# Altium PCB BoostSchDoc.PcbDoc
Units mm, origin at the board's own origin, x right, y up, seen from the top; angles counter-clockwise.
Board outline 43.43 x 26.11 mm, 2 copper layers (Top Layer, Bottom Layer); 15 components, 5 nets, 30 pads, 4 vias.
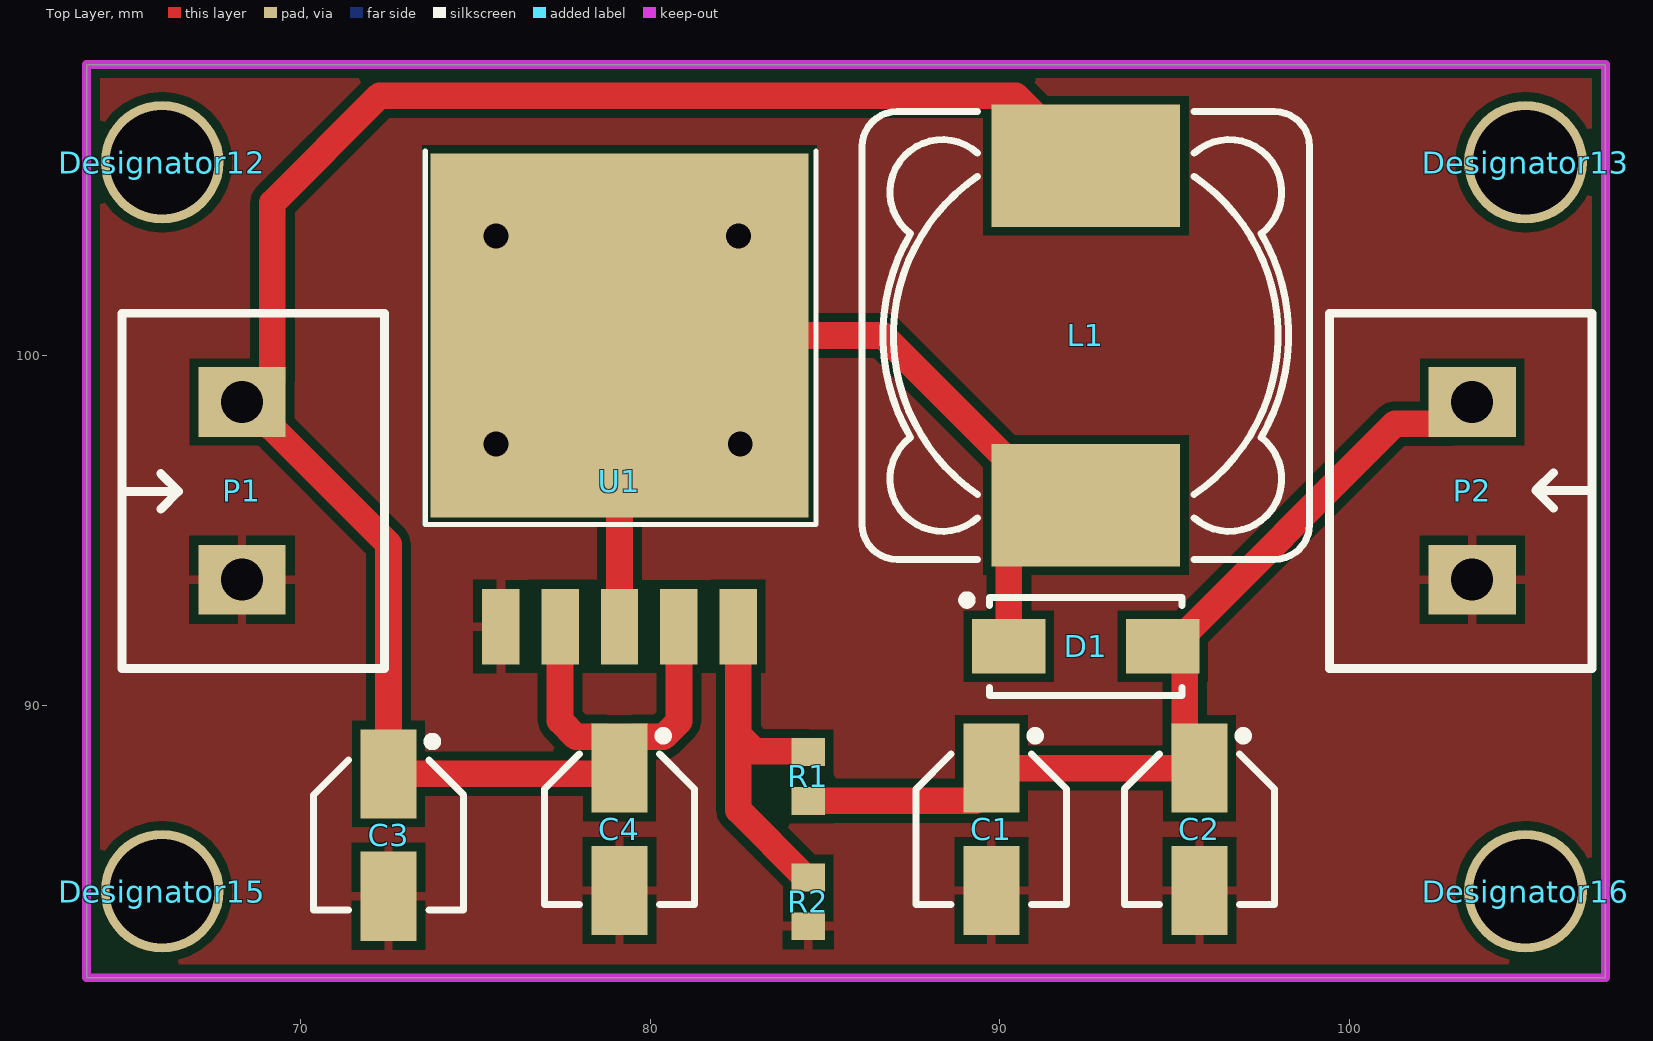
[diagram p0: Top Layer view]
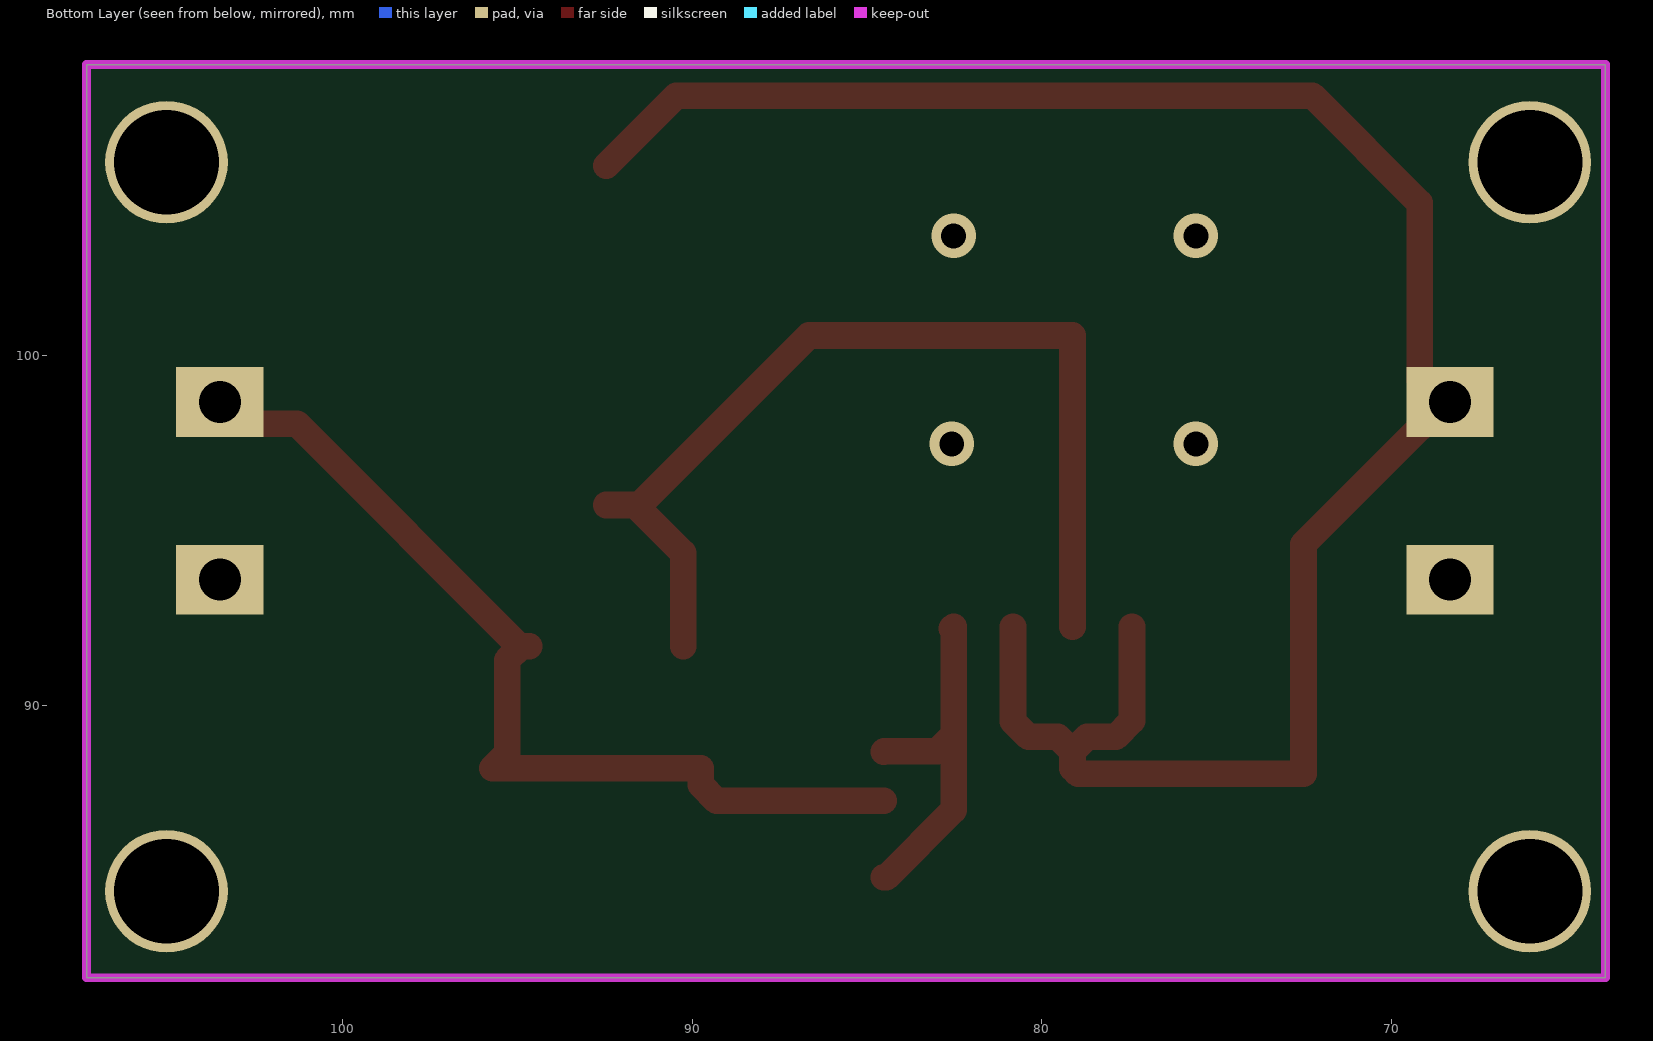
[diagram p1: Bottom Layer view, seen from below]
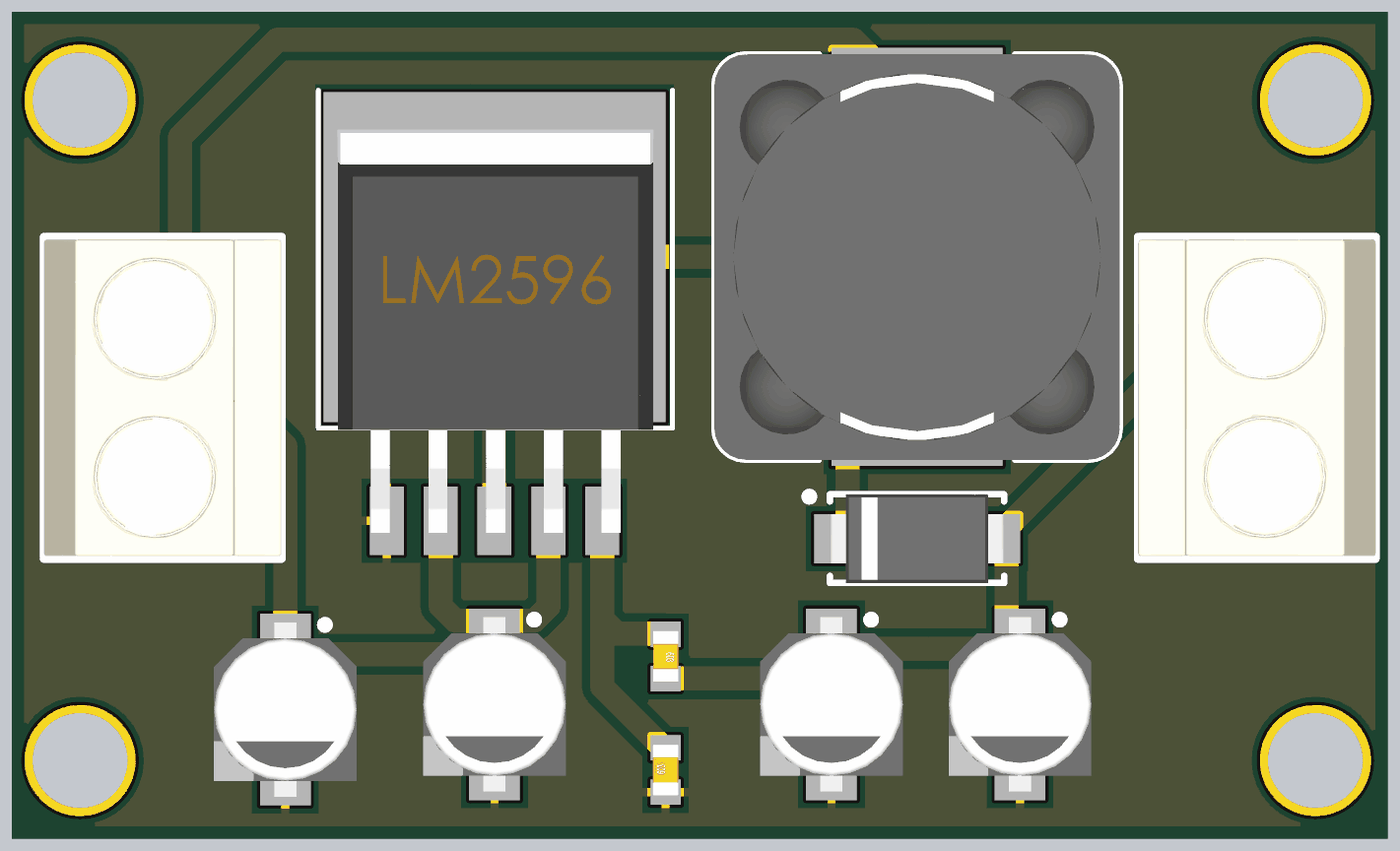
[diagram p2: 3D render of the assembled board from above, using the file's embedded part models]

## Layer stack, top to bottom
Top Solder: solder mask 0.0102, Solder Resist, Dk 3.5
Top Layer: signal copper 0.0356
Dielectric 1: dielectric 0.32, FR-4, Dk 4.8
Bottom Layer: signal copper 0.0356
Bottom Solder: solder mask 0.0102, Solder Resist, Dk 3.5

## Board outline
63.881,82.218 63.881,108.331 107.315,108.331 107.315,82.218

## Design rules (kind name [scope] priority, off if disabled: settings)
Clearance [All] p1: gap=0.254 ignorepadtopadclearanceinfootprint=FALSE except(0: Arc-Hole Track-Hole SMDPad-Hole THPad-Hole Via-Hole Fill-Hole Poly-Hole Region-Hole Text-Hole)
PolygonConnect [All] p1: connectstyle=Relief reliefconductorwidth=0.254 reliefentries=4 polygonreliefangle="90 Angle" airgapwidth=0.254
RoutingVias [All] p1: holewidth=0.711 width=1.27 viastyle="Through Hole" minholewidth=0.711 minwidth=1.27 maxholewidth=0.711 maxwidth=1.27
SolderMaskExpansion [All] p1: expansion=0.102
Width [All] p1: maxlimit=1.27 minlimit=0.254 preferedwidth=0.762 minimp=50.000000 maximp=50.000000 favimp=50.000000
30 further rules are at their usual default settings.

## Classes and differential pairs
component class BoostSchDoc: C1 C2 C3 C4 D1 L1 P1 P2 R1 R2 U1

## Components (designator, comment, footprint, x,y, rotation, side; value= is the part's Value field where it differs from the comment)
C1 "Cap Pol SMD" "CAP ALU SIZE B" 89.756,86.462 r270 top value=1uF
C2 "Cap Pol SMD" "CAP ALU SIZE B" 95.706,86.462 r270 top value=220uF/50v
C3 "Cap Pol SMD" "CAP ALU SIZE B" 72.517,86.298 r270 top value=47uF/50V
C4 "Cap Pol SMD" "CAP ALU SIZE B" 79.121,86.462 r270 top value=1uF
D1 "Zener" SS34 92.456,91.694 r0 top
Designator12 "Comment" "LO KHOAN 3MM"#1 66.04,105.537 r0 top
Designator13 "Comment" "LO KHOAN 3MM"#2 105.029,105.537 r0 top
Designator15 "Comment" "LO KHOAN 3MM"#3 66.04,84.69 r0 top
Designator16 "Comment" "LO KHOAN 3MM"#4 105.029,84.69 r0 top
L1 "Inductor" "INDUCTOR 12.5x12.5" 92.456,100.584 r270 top value=33uh/4A
P1 "Domino 2" "DOMINO 2- 5mm" 68.326,96.139 r90 top
P2 "Domino 2" "DOMINO 2- 5mm" 103.505,96.139 r270 top
R1 "RESISTOR SMD" RES-SM-0603 84.521,88.662 r270 top value=13.8K
R2 "RESISTOR SMD" RES-SM-0603 84.521,83.704 r90 top value=1K
U1 "XL6009" LM2596 75.721,92.259 r0 top

## Footprints (in the part's own frame and the unit in brackets; to place one, negate y for a bottom-side part, rotate by r counter-clockwise, add the part's x,y. Pads: shape width x height; smd on the part's side, far side on the other; paste and mask are expansions set on the pad)
"CAP ALU SIZE B" [mm] "Capacitor, Aluminium Electrolytric, 4.3mm L X 4.3mm W X 5.4mm H, IPC Medium Density"
  rect 2.55x1.6 smd: 1(-1.75,0) 2(1.75,0)
  silkscreen extent -2.8,-2.15 2.15,2.15, body extent -2.75,-2.25 2.75,2.25, height 5.7
"DOMINO 2- 5mm" [mm]
  rect 2x2.5 hole 1.2: 1(-2.54,0) 2(2.54,0)
  silkscreen extent -5.08,-4.08 5.08,3.43, body extent -5,-4.07 5,3.43, height 10
"INDUCTOR 12.5x12.5" [mm] "SMD Inductor  Body Width 12.5mm Body Lenght 12.5mm Height 8mm"
  rect 3.5x5.4 smd: 1(-4.85,0) 2(4.85,0)
  silkscreen extent -6.4,-6.4 6.4,6.4, body extent -6.4,-6.4 6.4,6.4, height 8
LM2596 [mm]
  rect 1.07x2.16 smd: 1(0,0) 2(1.7,0) 3(3.4,0) 4(5.1,0) 5(6.8,0)
  rect 10.8x10.41 smd: 6(3.4,8.325)
  silkscreen extent -2.16,2.92 9.02,13.59, body extent -1.57,-0.39 8.43,12.36, height 4.3
"LO KHOAN 3MM"#1 [mil]
  round 138 hole 118.1: 1(0,0)
"LO KHOAN 3MM"#2 [mil]
  round 138 hole 118.1: 2(0,0)
"LO KHOAN 3MM"#3 [mil]
  round 138 hole 118.1: 4(0,0)
"LO KHOAN 3MM"#4 [mil]
  round 138 hole 118.1: 3(0,0)
RES-SM-0603 [mm]
  rect 0.8x0.95 smd: 1(-0.014,0) 2(1.386,0)
  body extent -0.11,-0.4 1.49,0.4, height 0.3
SS34 [mm] "DO-214-AC/SMA Molded Diode, Body 5.3x2.6mm, IPC Medium Density"
  rect 2.1x1.55 smd: 1(-2.2,0) 2(2.2,0)
  silkscreen extent -3.52,-1.4 2.75,1.45, body extent -2.75,-1.4 2.75,1.4, height 2.3

## Part data
C1 C2 C3 C4: "Polarized Capacitor (Radial)"
D1: library part "D Schottky", "Schottky Diode", Code_JEDEC=DO-214-AA, LatestRevisionDate=17-Jul-2002, LatestRevisionNote="Re-released for DXP Platform.", PackageDescription="DO-214-AA/SMB; 2 C-Bend Leads; Body 5.3 x 3.6 mm, inc. leads (LxW)", PackageReference=SMB, Published=8-Jun-2000, Publisher="Altium Limited"
P1 P2: "Domino, 2-Pin", LatestRevisionDate=17-Jul-2002, LatestRevisionNote="Re-released for DXP Platform.", Publisher="Altium Limited"
R1 R2: "Resistor"
U1: "SMD"

## Via types
v1: diameter 1.27, hole 0.711, Top Layer to Bottom Layer, 4 vias

## Nets (pads, with @x,y where several pads share a name; then routed paths per layer and width w, separated by ;. In a path a pad name is that pad's centre, name@x,y a point inside that pad or via, vN(x,y) a via of type N, cw(c..) or ccw(c..) an arc to the next point about the centre after c; other vN are vias at no path point)
GND: C1.2 C2.2 C3.2 C4.2 P1.1 P2.2 R2.1 U1.1
NetC1_1: C1.1 C2.1 D1.2 P2.1 R1.2 | length 27.4
  Top Layer w0.762: R1.2 89.295,87.276 89.756,87.737 C1.1 C2.1 95.287,88.631 95.287,91.3 D1.2@94.893,91.694 ; D1.2 D1.2@94.893,91.694 ; P2.1 102.886,98.06 101.297,98.06 94.931,91.694 D1.2@94.893,91.694
NetC3_1: C3.1 C4.1 L1.1 P1.2 U1.2 U1.4 | length 60.9
  Top Layer w0.762: P1.2 P1.2@68.576,98.679 ; P1.2@68.326,98.808 P1.2@68.447,98.808 ; P1.2@68.576,98.808 P1.2@68.447,98.808 ; U1.2 77.421,89.568 77.884,89.106 78.702,89.106 C4.1@79.121,88.687 ; U1.4 80.821,89.552 80.375,89.106 79.54,89.106 C4.1@79.121,88.687 ; L1.1 90.448,107.442 72.263,107.442 69.195,104.374 69.195,99.298 P1.2@68.576,98.679 ; P1.2@68.447,98.808 P1.2@68.576,98.679 ; P1.2@68.576,98.679 69.195,98.06 69.195,97.939 72.517,94.617 C3.1 78.957,88.048 C4.1 C4.1@79.121,88.687
NetD1_1: D1.1 L1.2 U1.3 U1.6 | length 28.3
  Top Layer w0.762: U1.3 U1.6 86.656,100.584 91.506,95.734 L1.2@91.625,95.734 ; D1.1 90.256,94.365 L1.2@91.625,95.734 ; L1.2 L1.2@91.625,95.734
  other v1: 75.594,97.484 82.574,97.484 75.594,103.43 82.521,103.43
NetR1_1: R1.1 R2.2 U1.5 | length 10.3
  Top Layer w0.762: U1.5@82.574,92.206 U1.5 82.521,89.159 ; R2.2 84.446,85.09 82.521,87.015 82.521,89.159 ; R1.1 84.502,88.695 82.985,88.695 82.521,89.159
pads on no net: Designator12.1 Designator13.2 Designator15.4 Designator16.3

## Polygon pours and split planes (outlines as drawn)
GND on Top Layer "Top Layer-No Net" (solid, pour order 7): 63.881,82.218 63.881,108.331 107.315,108.331 107.315,82.218

## Keep-outs
Keep-Out Layer:
  the board outline again, w0.254